# EAGLE board flash_adapter (EAGLE 7.6.0)
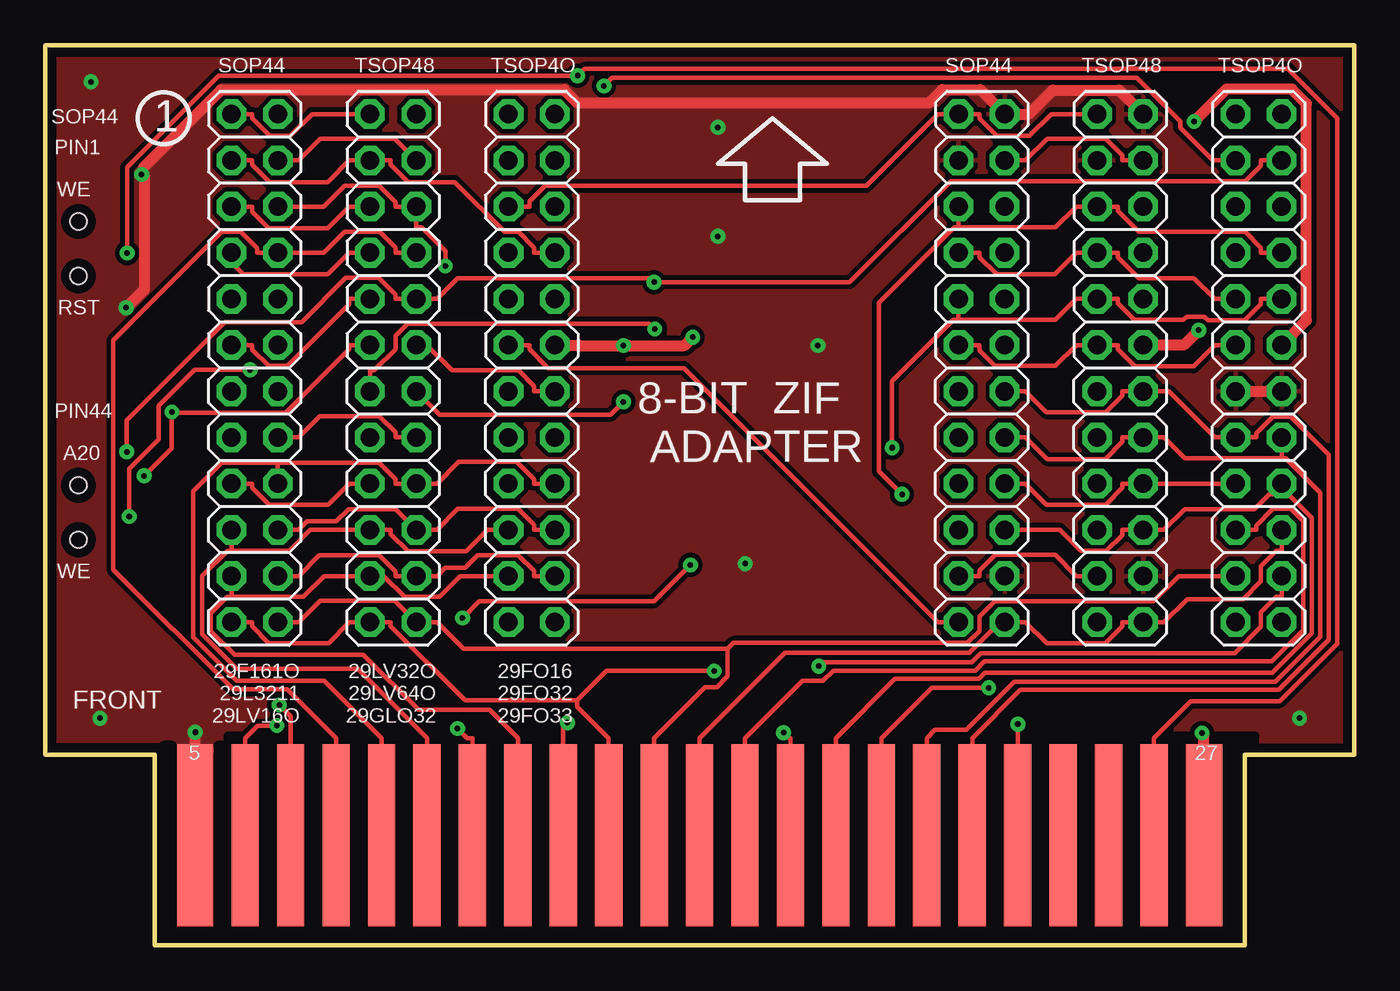
[diagram p0: board, top side]
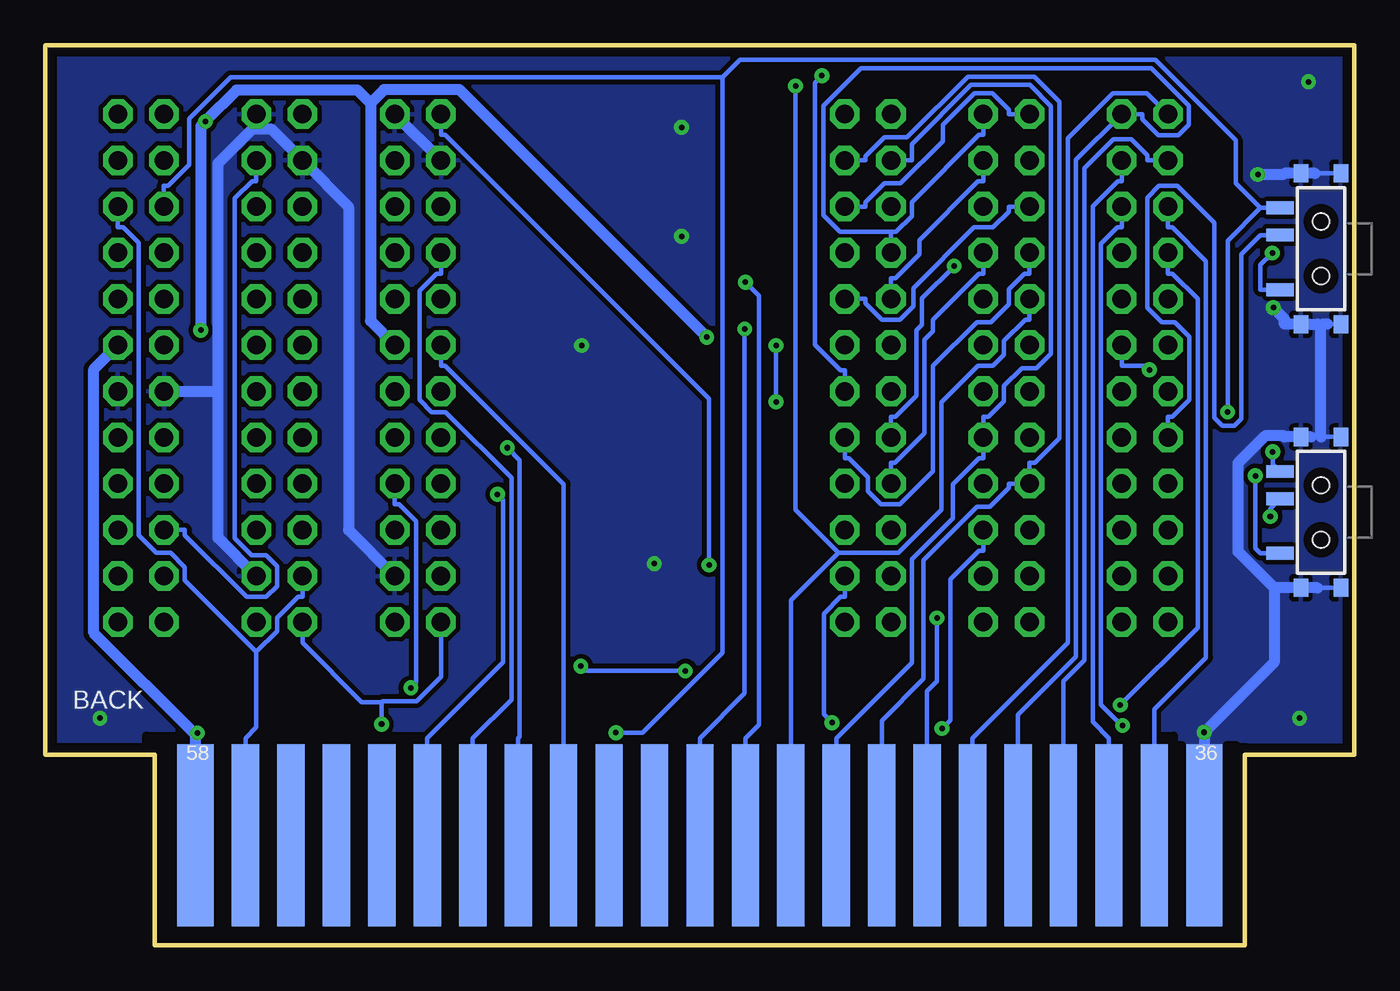
[diagram p1: board, bottom side, seen from below]

Size 72 x 49.5 mm. Coordinates in mm from the lower left corner, seen from the top.
Outline: 6,0 66,0 66,10.5 72,10.5 72,49.5 0,49.5 0,10.5 6,10.5 6,0
Copper layers (1*16): Top 0.035mm / dielectric 1.5mm / Bottom 0.035mm
Design rules "SparkFun_small": minimum track width 8mil, minimum drill 12mil, track to track 8mil, track to pad 8mil, pad to pad 8mil, via to via 8mil, smd to smd 8mil, copper to edge 20mil, drill to drill 12mil, minimum pad ring 12mil, minimum via ring 10mil, stop-mask expansion 4mil, vias tented up to drill 25mil, thermal gap 10mil
Net classes: 0 default: width 0.254 mm, drill 0.305 mm, clearance 0.203 mm; 1 power: width 0.61 mm, drill 0.406 mm, clearance 0.203 mm; 2 gnd: width 0.61 mm, drill 0.406 mm, clearance 0.203 mm; 3 power usb: width 0.61 mm, drill 0.406 mm, clearance 0.203 mm
tRestrict: area 10,6.5 to 66.5,11.5; area 6.5,10.5 to 7,11; area 9.5,10.5 to 10,11; area 12,10.5 to 12.5,11; area 14.5,10.5 to 15,11; area 17,10.5 to 17.5,11; area 19.5,10.5 to 20,11; area 22,10.5 to 22.5,11; area 24.5,10.5 to 25,11; area 27,10.5 to 27.5,11; area 29.5,10.5 to 30,11; area 32,10.5 to 32.5,11; 13 more areas
bRestrict: area 9.9,6.5 to 66.4,11.5; area 65,10.5 to 65.5,11; area 62,10.5 to 62.5,11; area 59.5,10.5 to 60,11; area 57,10.5 to 57.5,11; area 54.5,10.5 to 55,11; area 52,10.5 to 52.5,11; area 49.5,10.5 to 50,11; area 47,10.5 to 47.5,11; area 44.5,10.5 to 45,11; area 42,10.5 to 42.5,11; area 39.5,10.5 to 40,11; 13 more areas

## Footprints (pad centres in the part's own frame; a part is rotated, then mirrored left to right if it is on the bottom)
SMD-SWITCH = smd 0.7 x 1.5: O -2.25,2.25; P 0.75,2.25; S 2.25,2.25 | smd 1 x 0.8: P$1 -4.15,1.1; P$2 -4.15,-1.1; P$3 4.15,-1.1; P$4 4.15,1.1 | hole 0.9: -1.5,0; 1.5,0
2X12 = drill 1.016 octagon: 1 -13.97,-1.27; 2 -13.97,1.27; 3 -11.43,-1.27; 4 -11.43,1.27; 5 -8.89,-1.27; 6 -8.89,1.27; 7 -6.35,-1.27; 8 -6.35,1.27; 9 -3.81,-1.27; 10 -3.81,1.27; 11 -1.27,-1.27; 12 -1.27,1.27; 13 1.27,-1.27; 14 1.27,1.27; 15 3.81,-1.27; 16 3.81,1.27; 17 6.35,-1.27; 18 6.35,1.27; 19 8.89,-1.27; 20 8.89,1.27; 21 11.43,-1.27; 22 11.43,1.27; 23 13.97,-1.27; 24 13.97,1.27
SNESCART_PINS_LONG = smd 2 x 10: 5 -27.75,-2; 27 27.75,-2 | smd 1.5 x 10: 6 -25,-2; 7 -22.5,-2; 8 -20,-2; 9 -17.5,-2; 10 -15,-2; 11 -12.5,-2; 12 -10,-2; 13 -7.5,-2; 14 -5,-2; 15 -2.5,-2; 16 0,-2; 17 2.5,-2; 18 5,-2; 19 7.5,-2; 20 10,-2; 21 12.5,-2; 22 15,-2; 23 17.5,-2; 24 20,-2; 25 22.5,-2; 26 25,-2 | smd 2 x 10 bottom: 36 -27.75,-2; 58 27.75,-2 | smd 1.5 x 10 bottom: 37 -25,-2; 38 -22.5,-2; 39 -20,-2; 40 -17.5,-2; 41 -15,-2; 42 -12.5,-2; 43 -10,-2; 44 -7.5,-2; 45 -5,-2; 46 -2.5,-2; 47 0,-2; 48 2.5,-2; 49 5,-2; 50 7.5,-2; 51 10,-2; 52 12.5,-2; 53 15,-2; 54 17.5,-2; 55 20,-2; 56 22.5,-2; 57 25,-2

## Placement (x,y rotation side)
A20/WE  SMD-SWITCH  [SMD-SWITCH]  1.82,23.82 90 bottom
JP1  [2X12]  11.51,31.75 270 top
JP2  [2X12]  51.51,31.75 270 top
JP3  [2X12]  19.13,31.75 270 top
JP4  [2X12]  59.13,31.75 270 top
JP5  [2X12]  26.75,31.75 270 top
JP6  [2X12]  66.75,31.75 270 top
U$1  SNES-CART_PINS_LONG  [SNESCART_PINS_LONG]  35.99,8.07 0 top
WE/RST  SMD-SWITCH  [SMD-SWITCH]  1.82,38.32 90 bottom

## Library data of the parts
A20/WE WE/RST = !sanni; PROD_ID: SWCH-10651
JP1-JP6 = pinhead
U$1 = !sanni_mod2

## Nets
A20/WE: A20/WE.P JP1.12
ADC0: JP2.4 JP4.4 JP6.19 U$1.17
ADC1: JP2.24 JP4.24 JP6.20 U$1.16
ADC2: JP1.24 JP3.24 JP6.21 U$1.15
ADC3: JP1.23 JP3.23 JP6.22 U$1.14
ADC4: JP1.22 JP3.22 JP5.22 U$1.13
ADC5: JP1.21 JP3.21 JP5.21 U$1.12
ADC6: JP1.20 JP3.20 JP5.20 U$1.11
ADC7: JP1.19 JP3.19 JP5.19 U$1.10
ADC8: JP1.18 JP3.18 JP5.18 U$1.9
ADC9: JP1.8 JP3.8 JP5.17 U$1.8
ADC10: JP1.7 JP3.7 JP5.16 U$1.7
ADC11: JP1.6 JP3.6 JP5.15 U$1.6
ADC12: JP1.5 JP3.5 JP5.10 U$1.37
ADC13: JP1.4 JP3.4 JP5.9 U$1.38
ADC14: JP1.3 JP3.3 JP5.8 U$1.39
ADC15: JP1.2 JP3.2 JP5.7 U$1.40
GND [gnd]: A20/WE.P$1 A20/WE.P$2 A20/WE.P$3 A20/WE.P$4 JP2.2 JP2.3 JP2.22 JP4.2 JP4.3 JP4.22 JP6.13 JP6.14 U$1.5 U$1.36 WE/RST.P$1 WE/RST.P$2 WE/RST.P$3 WE/RST.P$4
PC0: JP2.20 JP4.20 JP6.18 U$1.19
PC1: JP2.18 JP4.18 JP6.17 U$1.20
PC2: JP2.16 JP4.16 JP6.16 U$1.21
PC3: JP2.14 JP4.14 JP6.15 U$1.22
PC4: JP2.11 JP4.11 JP6.11 U$1.50
PC5: JP2.9 JP4.9 JP6.10 U$1.51
PC6: JP2.7 JP4.7 JP6.9 U$1.52
PC7: JP2.5 JP4.5 JP6.8 U$1.53
PH0: JP3.12 JP5.14 U$1.26 WE/RST.O
PH1: JP2.21 JP4.21 JP6.6 U$1.57
PH3: U$1.49
PH4: A20/WE.O JP3.11 JP6.5 U$1.18 WE/RST.S
PH6: JP2.23 JP4.23 JP5.11 U$1.23
PL0: JP1.1 JP3.1 JP5.6 U$1.41
PL1: JP2.1 JP4.1 JP5.5 U$1.42
PL2: JP1.17 JP3.17 JP5.4 U$1.43
PL3: JP1.16 JP3.16 JP5.3 U$1.44
PL4: JP1.11 JP3.9 JP6.3 U$1.45
PL5: A20/WE.S JP3.10 JP6.4 U$1.46
PL6: JP3.13 U$1.47
VCC [power usb]: JP2.12 JP3.14 JP4.12 JP5.12 JP6.12 U$1.27 U$1.58
WE/RST: JP1.15 WE/RST.P

## Tracks (layer width: path | path; a pad name or v marks a point on that pad's centre or on a via)
A20/WE  (via drill 0.3 pad 0.81)
  Top 0.254: v4.61,23.59 4.61,26.23 6.22,27.84 6.22,29.68 8.2,31.66 v11.26,31.66
  Bottom 0.254: v11.26,31.66 11.48,31.88 12.78,31.88 JP1.12 | v4.61,23.59 4.61,24.03 A20/WE.P
ADC0
  Top 0.254: JP6.19 66.62,22.86 66.62,23.1 67.54,24.01 68.52,24.01 69.21,23.32 69.21,17.35 67.48,15.62 51.66,15.62 51.16,15.12 43.34,15.12 42.79,14.56 41.65,14.56 38.49,11.4 U$1.17 | JP4.4 59.83,43.18 59.26,43.18 59.26,43.47 58.35,44.37 55.11,44.37 53.92,43.18 JP2.4
  Bottom 0.254: JP4.4 60.4,42.04 60.64,42.04 61.58,41.09 61.58,22.4 60.65,21.46 59.86,21.46 59.26,20.86 59.26,19.77 59.85,19.18 60.94,19.18 64.34,22.57 64.34,22.86 JP6.19
ADC1
  Top 0.254: U$1.16 35.99,11.4 40.69,16.1 50.84,16.1 52.52,17.78 JP2.24 53.92,17.78 55.09,16.61 58.33,16.61 59.26,17.54 59.26,17.78 JP4.24 61.54,17.78 62.81,19.05 65.91,19.05 66.88,20.02 66.88,20.86 67.73,21.72 68.02,21.72 JP6.20
ADC2
  Top 0.254: JP6.21 62.36,20.32 60.96,18.92 52.23,18.92 51.39,18.08 51.39,17.29 50.73,16.64 37.86,16.64 37.53,16.31 | 37.53,16.31 23.01,16.31 21.54,17.78 JP3.24 19.22,18.96 15.11,18.96 13.92,17.78 JP1.24 | 37.53,16.31 37.53,14.79 36.94,14.2 36.29,14.2 33.49,11.4 U$1.15
ADC3  (via drill 0.3 pad 0.81)
  Top 0.254: v42.54,15.36 42.76,15.58 50.97,15.58 51.47,16.07 65.43,16.07 66.88,17.52 66.88,18.32 67.73,19.18 68.02,19.18 JP6.22 | 29.26,13.47 30.88,15.1 v36.8,15.1 | 29.26,13.47 29.26,13.13 30.99,11.4 U$1.14 | 29.26,13.47 23.09,13.47 19,17.56 19,17.78 JP3.23 16.72,17.78 15.57,16.63 12.29,16.63 11.38,17.54 11.38,17.78 JP1.23
  Bottom 0.254: v36.8,15.1 42.28,15.1 v42.54,15.36
ADC4  (via drill 0.3 pad 0.81)
  Top 0.254: U$1.13 28.49,12.02 v28.73,12.26 | JP5.22 26.88,20.32 26.88,20.61 26.02,21.47 23.79,21.47 23.1,20.78 22,20.78 21.54,20.32 JP3.22 19.26,20.32 19.26,20.56 18.35,21.47 15.07,21.47 13.92,20.32 JP1.22
  Bottom 0.254: JP5.22 28.02,19.18 28.26,19.18 29.18,18.25 29.18,12.71 v28.73,12.26
ADC5
  Top 0.254: 10.24,19.18 14.19,19.18 15.34,20.32 JP3.21 18.61,20.32 19.76,19.17 21.68,19.17 22.83,20.32 JP5.21 | JP1.21 10.24,19.18 | U$1.12 25.99,11.4 24.43,12.96 20.52,12.96 17.49,15.99 10.4,15.99 9.1,17.3 9.1,18.27 10,19.18 10.24,19.18
ADC6  (via drill 0.3 pad 0.81)
  Top 0.254: v22.67,11.93 23.2,11.4 23.49,11.4 U$1.11 | JP5.20 26.88,22.86 26.88,23.15 26.02,24.01 22.69,24.01 21.54,22.86 JP3.20 19.26,24 16.68,24 16.01,23.33 14.4,23.33 13.92,22.86 JP1.20
  Bottom 0.254: v22.67,11.93 22.21,12.39 22.21,20.14 20.64,21.72 20.4,21.72 JP3.20
ADC7
  Top 0.254: 10.24,21.72 10.02,21.72 8.64,20.34 8.64,17.11 10.53,15.21 17.18,15.21 20.99,11.4 U$1.10 | 10.24,21.72 13.43,21.72 14.57,22.86 JP3.19 18.43,22.86 19,22.86 19,22.62 19.95,21.67 23.15,21.67 24.34,22.86 JP5.19 | JP1.19 10.24,21.72
ADC8
  Top 0.254: 12.78,26.54 9.68,26.54 8.12,24.98 8.12,16.95 10.52,14.55 15.34,14.55 18.49,11.4 U$1.9 | 12.78,26.54 18.35,26.54 19.26,25.64 19.26,25.4 JP3.18 21.54,25.4 22.73,26.59 25.92,26.59 26.88,25.64 26.88,25.4 JP5.18 | JP1.18 12.78,26.54
ADC9
  Top 0.254: U$1.8 15.99,11.4 13.3,14.09 10.32,14.09 3.74,20.67 3.74,33.28 9.7,39.25 10.73,39.25 11.64,38.34 11.64,38.1 JP1.8 15.3,38.1 16.45,39.25 18.38,39.25 19.26,38.37 19.26,38.1 JP3.8
  Bottom 0.254: JP3.8 20.4,36.96 20.64,36.96 23.18,34.42 23.18,33.77 23.64,33.31 23.64,28.16 25.25,26.54 25.48,26.54 JP5.17
ADC10  (via drill 0.3 pad 0.81)
  Top 0.254: v12.87,13.23 13.49,12.6 13.49,11.4 U$1.7 | JP3.7 16.72,38.1 15.54,36.92 10.87,36.92 10.24,37.55 JP1.7
  Bottom 0.254: v12.87,13.23 8.61,17.48 8.61,35.56 10,36.96 10.24,36.96 JP1.7 | JP5.16 28.02,26.8 27.78,26.8 26.75,25.76 26.75,24.97 26.03,24.26 24.99,24.26 23.16,26.08 23.16,31.89 20.76,34.29 19.97,34.29 19,35.26 19,36.1 18.15,36.96 17.86,36.96 JP3.7
ADC11  (via drill 0.3 pad 0.81)
  Top 0.254: JP1.6 15.3,40.64 16.45,41.78 18.35,41.78 19.26,40.88 19.26,40.64 JP3.6 20.4,39.5 20.69,39.5 22,38.18 v22,37.36 | U$1.6 10.99,11.4 11.69,12.1 v12.74,12.1
  Bottom 0.254: JP1.6 12.78,39.5 13.02,39.5 13.92,38.59 13.92,13.24 12.78,12.1 v12.74,12.1 | JP5.15 25.48,29.08 25.24,29.08 24.09,30.23 24.09,33.83 23.77,34.15 23.77,35.6 v22,37.36
ADC12
  Top 0.254: JP3.5 16.72,40.64 15.53,39.45 12.29,39.45 11.38,40.35 11.38,40.64 JP1.5
  Bottom 0.254: JP1.5 10.24,39.5 10,39.5 8.15,37.65 8.15,15.82 10.99,12.98 U$1.37 | JP5.10 26.88,35.56 26.88,35.32 25.96,34.41 25,34.41 24.25,35.16 24.25,36.16 20.91,39.5 19.86,39.5 19,40.35 19,40.64 JP3.5
ADC13
  Top 0.254: JP1.4 13.92,43.18 15.11,44.37 19.21,44.37 JP3.4
  Bottom 0.254: JP5.9 25.48,36.7 25.24,36.7 23.93,38.02 23.93,38.8 20.69,42.04 20.4,42.04 JP3.4 | U$1.38 13.49,11.4 14.38,12.29 14.38,40.66 13,42.04 12.78,42.04 JP1.4
ADC14
  Top 0.254: JP5.8 26.88,38.1 26.88,38.39 26.02,39.24 25.25,39.24 22.51,41.98 19.96,41.98 19,42.94 19,43.18 JP3.3 16.72,43.18 15.53,41.99 12.34,41.99 11.38,42.94 11.38,43.18 JP1.3
  Bottom 0.254: U$1.39 15.99,14.53 14.84,15.68 14.84,42.74 13.26,44.33 12.26,44.33 11.38,43.45 11.38,43.18 JP1.3
ADC15
  Bottom 0.254: U$1.40 18.49,12.68 15.3,15.87 15.3,43.2 JP1.2 11.64,45.72 11.64,45.43 10.76,44.56 9.66,44.56 9.09,45.13 9.09,46.19 11.14,48.25 27.14,48.25 29.19,46.2 29.19,40.15 28.28,39.24 25.48,39.24 | 25.48,39.24 25.48,39.13 JP5.7 | JP3.2 20.4,44.58 20.64,44.58 24.34,40.88 24.34,40.1 25.19,39.24 25.48,39.24
GND  (via drill 0.3 pad 0.81)
  Top 0.61: 5.38,42.4 5.38,42.78 9.66,47.06 28.54,47.06 29.25,46.36 48.64,46.36 49.35,47.06 51.44,47.06 JP2.2 54.1,45.72 55.42,47.04 59.08,47.04 JP4.2 | v5.29,42.4 5.38,42.4 | v4.44,35.08 5.45,36.09 5.45,42.33 5.38,42.4 | JP6.13 JP6.14 | v8.24,11.73 8.24,11.58 U$1.36
  Bottom 0.254: 1.46,34.17 WE/RST.P$2 | 2.14,42.47 WE/RST.P$3 | 2.37,27.97 1.82,27.97 A20/WE.P$3 | 2.01,19.67 A20/WE.P$2
  Bottom 0.61: JP2.22 55.32,22.86 55.32,40.64 JP4.3 59.59,44.91 60.4,44.91 | v4.44,35.08 3.83,34.47 3.83,34.17 WE/RST.P$1 2.47,34.17 2.01,34.17 1.91,34.06 1.82,34.06 | 4.39,19.67 6.37,21.65 6.37,26.54 4.86,28.06 3.92,28.06 3.83,27.97 A20/WE.P$4 2.37,27.97 | 62.5,30.48 62.5,43.01 60.6,44.91 60.4,44.91 | 60.4,44.91 JP4.2 | JP4.22 62.5,22.42 62.5,30.48 | 62.5,30.48 64.16,30.48 JP6.13 | v5.29,42.4 3.9,42.4 3.83,42.47 WE/RST.P$4 2.14,42.47 | JP2.2 JP2.3 | 4.39,19.67 4.39,15.58 v8.24,11.73 U$1.36 | 4.39,19.67 A20/WE.P$1 2.01,19.67 | 1.46,34.17 1.71,34.17 1.82,34.06 | 1.82,27.97 1.82,34.06
  other vias: 42.5,33 38.5,21 37,45 37,39 2.5,47.5 3,12.5 69,12.5
  pour Bottom (isolate 0.254): 0,10.5 72,10.5 72,49.5 0,49.5
  pour Top (isolate 0.254): 0,10.5 72,10.5 72,49.5 0,49.5
PC0
  Top 0.254: 68.02,24.82 68.38,24.82 69.69,23.52 69.69,17.18 67.51,15 51.69,15 51.35,14.66 46.75,14.66 43.49,11.4 U$1.19 | 68.02,24.82 67.34,24.82 66.52,24 62.69,24 61.54,22.86 JP4.20 59.26,22.86 59.26,22.57 58.38,21.7 56.98,21.7 55.82,22.86 JP2.20 | JP6.18 68.02,24.82
PC1  (via drill 0.3 pad 0.81)
  Top 0.254: U$1.20 45.99,11.4 48.76,14.17 v51.9,14.17 | JP2.18 53.92,25.4 55.08,24.25 58.34,24.25 59.26,25.16 59.26,25.4 JP4.18 JP6.17
  Bottom 0.254: JP2.18 52.78,24.26 52.54,24.26 51.61,23.32 51.61,14.46 v51.9,14.17
PC2
  Top 0.254: 68.02,26.8 62.69,26.8 61.54,27.94 JP4.16 59.26,27.94 59.26,27.7 58.3,26.75 55.11,26.75 53.92,27.94 JP2.16 | 68.02,26.8 68.02,26.91 JP6.16 | U$1.21 48.49,11.4 48.95,11.86 50.66,11.86 53.31,14.51 67.67,14.51 70.15,16.99 70.15,24.9 68.26,26.8 68.02,26.8
PC3
  Top 0.254: U$1.22 50.99,11.4 53.64,14.05 67.86,14.05 70.61,16.8 70.61,26.98 68.51,29.08 67.53,29.08 66.62,28.18 66.62,27.94 JP6.15 64.34,27.94 61.8,30.48 61.54,30.48 JP4.14 59.26,30.48 59.26,30.24 58.34,29.33 55.08,29.33 53.92,30.48 JP2.14
PC4
  Top 0.254: JP2.11 51.38,33.02 51.38,32.73 52.24,31.88 55.57,31.88 56.72,33.02 JP4.11 58.43,33.02 59,33.02 59,32.78 59.93,31.85 63.17,31.85 64.34,33.02 JP6.11
  Bottom 0.254: U$1.50 43.49,11.4 43.49,25.36 50,31.88 50.24,31.88 JP2.11
PC5  (via drill 0.3 pad 0.81)
  Top 0.254: v46.59,27.37 46.59,31.04 49.97,34.42 50.24,34.42 | JP6.10 66.88,35.56 66.88,35.27 65.98,34.38 63.98,34.38 63.77,34.59 62.79,34.59 62.62,34.42 59.91,34.42 59,35.32 59,35.56 JP4.9 56.72,35.56 55.57,34.42 50.24,34.42 | 50.24,34.42 50.24,34.53 JP2.9
  Bottom 0.254: v46.59,27.37 45.91,26.69 45.91,11.48 45.99,11.4 U$1.51
PC6
  Top 0.254: JP2.7 51.38,38.1 51.38,37.86 52.34,36.91 55.53,36.91 56.72,38.1 JP4.7 58.43,38.1 59,38.1 59,37.86 60.16,36.7 63.19,36.7 64.34,35.56 JP6.9
  Bottom 0.254: JP2.7 50.24,36.96 50.48,36.96 51.41,36.02 51.41,30.01 50.74,29.34 49.98,29.34 46.36,25.72 46.36,13.53 48.49,11.4 U$1.52
PC7  (via drill 0.3 pad 0.81)
  Top 0.254: 50.24,39.5 55.57,39.5 56.72,40.64 JP4.5 58.43,40.64 59,40.64 59,40.4 60.16,39.24 66.02,39.24 66.88,38.39 66.88,38.1 JP6.8 | v47.12,24.81 45.85,26.09 45.85,35.34 50,39.5 50.24,39.5 | JP2.5 50.24,39.5
  Bottom 0.254: v47.12,24.81 46.82,24.51 46.82,15.57 50.99,11.4 U$1.53
PH0  (via drill 0.3 pad 0.81)
  Top 0.254: v4.49,38.09 4.49,42.8 9.54,47.84 v29.28,47.84 29.65,48.21 68.36,48.21 71.07,45.51 71.07,16.59 67.91,13.43 63.02,13.43 60.99,11.4 U$1.26 | JP5.14 27.45,30.48 26.88,30.48 26.88,30.77 26.02,31.62 22.37,31.62 20.97,33.02 JP3.12
  Bottom 0.254: v29.28,47.84 29.66,47.46 29.66,33.03 28.26,31.62 28.02,31.62 JP5.14 | v4.49,38.09 5.15,37.43 5.15,36.07 WE/RST.O
PH1
  Top 0.254: JP4.21 56.72,20.32 55.56,21.48 52.25,21.48 51.38,20.61 51.38,20.32 JP2.21
  Bottom 0.254: 60.39,16.15 60.39,12 60.99,11.4 U$1.57 | 60.39,16.15 64.34,20.09 64.34,20.8 65.12,21.59 65.91,21.59 66.88,22.56 66.88,38.64 67.73,39.5 68.02,39.5 JP6.6 | 60.39,16.15 59.26,17.28 59.26,18.02 58.1,19.18 57.86,19.18 JP4.21
PH4  (via drill 0.3 pad 0.81)
  Top 0.254: 6.96,29.29 v6.96,29.34 | v5.43,25.83 6.96,27.35 6.96,29.29 | 6.96,29.29 13.22,29.29 16.72,32.78 16.72,33.02 JP3.11 | v40.61,11.7 40.91,11.4 40.99,11.4 U$1.18
  Bottom 0.254: 5.15,40.57 6.96,38.76 v6.96,29.34 | 34.75,47.74 61.82,47.74 64.09,45.47 64.09,42.94 65.24,41.78 65.48,41.78 JP6.5 | 34.75,47.74 33.79,48.7 10.94,48.7 6.51,44.27 6.51,41.93 5.15,40.57 | v40.61,11.7 39.15,11.7 34.75,16.1 34.75,47.74 | WE/RST.S 5.15,40.57 | v5.43,25.83 5.43,21.85 5.15,21.57 A20/WE.O
PH6  (via drill 0.3 pad 0.81)
  Top 0.254: JP5.11 26.62,33.02 26.62,32.78 27.66,31.75 35.13,31.75 49.1,17.78 JP2.23 | v53.5,12.17 53.5,11.41 53.49,11.4 U$1.23
  Bottom 0.254: 53.5,13.37 53.44,13.44 51.59,13.44 50.24,14.79 50.24,16.64 JP2.23 | 53.5,13.37 v53.5,12.17 | 53.5,13.37 54.6,13.37 57.86,16.64 JP4.23
PL0
  Top 0.254: JP3.1 14.66,45.72 13.47,44.53 12.34,44.53 11.38,45.48 11.38,45.72 JP1.1
  Bottom 0.254: JP1.1 11.4,46.88 13.27,46.88 15.75,44.4 15.75,16.64 20.99,11.4 U$1.41 | JP5.6 26.88,40.64 26.88,40.88 25.84,41.91 24.95,41.91 22.62,44.24 22.62,45.13 20.88,46.88 19.91,46.88 19,45.97 19,45.72 JP3.1
PL1  (via drill 0.3 pad 0.81)
  Top 0.254: v22.95,18.01 23.87,18.92 33.48,18.92 v35.48,20.93 | JP5.5 26.62,40.64 26.62,40.93 27.48,41.78 45.16,41.78 49.1,45.72 JP2.1 51.38,45.72 51.38,45.48 52.34,44.53 54.15,44.53 55.34,45.72 JP4.1
  Bottom 0.254: JP2.1 50.24,44.58 50,44.58 35.48,30.06 v35.48,20.93 | U$1.42 23.49,13.98 22.95,14.52 v22.95,18.01
PL2
  Top 0.254: JP1.17 11.38,25.4 11.38,25.16 12.31,24.23 15.55,24.23 16.72,25.4 JP3.17
  Bottom 0.254: U$1.43 25.99,11.4 25.99,12.36 23.69,14.66 23.69,21.19 20.75,24.13 20.04,24.13 19,25.16 19,25.4 JP3.17 17.86,26.54 17.57,26.54 16.21,27.9 16.21,46.42 17.59,47.79 21.26,47.79 24.6,44.45 25.84,44.45 26.88,43.42 26.88,43.18 JP5.4
PL3
  Top 0.254: JP1.16 13.92,27.94 15.1,29.11 18.37,29.11 19.26,28.23 19.26,27.94 JP3.16
  Bottom 0.254: JP5.3 24.34,43.18 24.34,44.06 21.07,47.33 17.84,47.33 16.67,46.17 16.67,32.55 17.48,31.75 18.29,31.75 19.26,30.78 19.26,29.94 20.11,29.08 20.4,29.08 JP3.16 20.4,26.8 20.64,26.8 22.08,25.36 22.08,23.49 24.34,21.23 24.34,15.55 28.49,11.4 U$1.44
PL4  (via drill 0.3 pad 0.81)
  Top 0.254: v30.73,47.27 31.18,47.72 60.04,47.72 62.43,45.33 62.43,44.98 64.23,43.18 64.34,43.18 JP6.3 | JP3.9 16.72,35.56 16.72,35.27 13.32,31.87 12.28,31.87 11.38,32.77 11.38,33.02 JP1.11
  Bottom 0.254: 28.37,21.59 25.08,21.59 22.71,23.97 22.71,29.87 20.7,31.88 19.86,31.88 19.26,32.48 19.26,33.26 18.1,34.42 17.86,34.42 JP3.9 | 28.37,21.59 30.99,18.98 30.99,11.4 U$1.45 | v30.73,47.27 30.73,23.95 28.37,21.59
PL5  (via drill 0.3 pad 0.81)
  Top 0.254: v4.48,27.15 4.48,28.9 9.87,34.29 14.09,34.29 16.53,36.73 18.32,36.73 19.26,35.8 19.26,35.56 JP3.10 21.54,35.56 22.69,36.7 33.26,36.7 v33.49,36.48 44.25,36.48 49.81,42.04 66.02,42.04 66.88,42.89 66.88,43.18 JP6.4
  Bottom 0.254: A20/WE.S 4.48,26.48 v4.48,27.15 | v33.49,36.48 32.75,35.74 32.75,12.14 33.49,11.4 U$1.46
PL6  (via drill 0.3 pad 0.81)
  Top 0.254: JP3.13 17.86,31.62 18.1,31.62 19.26,32.78 19.26,33.53 19.92,34.19 33.24,34.19 v33.53,33.91
  Bottom 0.254: U$1.47 35.99,11.4 33.53,13.86 v33.53,33.91
VCC  (via drill 0.3 pad 0.81)
  Top 0.254: JP3.14 21.68,29.2 31.1,29.2 v31.8,29.9 | v31.8,32.99 32.1,32.99
  Top 0.61: JP6.12 69.38,34.38 69.38,46.3 68.58,47.1 64.98,47.1 v63.2,45.32 | v63.45,33.84 62.63,33.02 JP4.12 | v35.61,33.45 35.15,32.99 32.1,32.99 v31.8,32.99 29.37,32.99 29.34,33.02 JP5.12 | v63.64,11.68 63.74,11.58 U$1.27
  Bottom 0.254: v31.8,29.9 v31.8,32.99
  Bottom 0.61: 54.11,46.32 54.83,47.04 61.48,47.04 v63.2,45.32 63.45,45.07 v63.45,33.84 | 54.11,46.32 54.11,34.35 JP2.12 | v35.61,33.45 49.22,47.06 53.37,47.06 54.11,46.32 | 63.74,11.58 69.34,17.18 69.34,31.7 JP6.12 | 63.74,11.58 v63.64,11.68 | U$1.27 63.74,11.58
WE/RST
  Bottom 0.254: JP1.15 10.24,29.08 10.01,29.08 9.07,30.03 9.07,33.49 9.87,34.29 10.59,34.29 11.38,35.08 11.38,41.13 10.73,41.78 9.73,41.78 7.69,39.74 7.69,29.03 7.25,28.59 6.6,28.59 6.21,28.97 6.21,38.01 5.15,39.07 WE/RST.P

## Text on the board
tNames: SOP44 | TSOP48 | TSOP4O | SOP44 | TSOP48 | TSOP4O | SOP44 | 1 | PIN1 | WE | RST | PIN44 | A20 | 8-BIT ZIF / ADAPTER | WE | 29F161O / 29L3211 / 29LV16O | 29LV32O / 29LV64O / 29GLO32 | 29FO16 / 29FO32 / 29FO33 | FRONT | 5 | 27
bNames: BACK | 36 | 58